# Altium PCB tree.PcbDoc
Units mm, origin at the board's own origin, x right, y up, seen from the top; angles counter-clockwise.
Board outline 106.17 x 111.16 mm, 2 copper layers (Top Layer, Bottom Layer); 29 components, 18 nets, 64 pads, 21 vias.
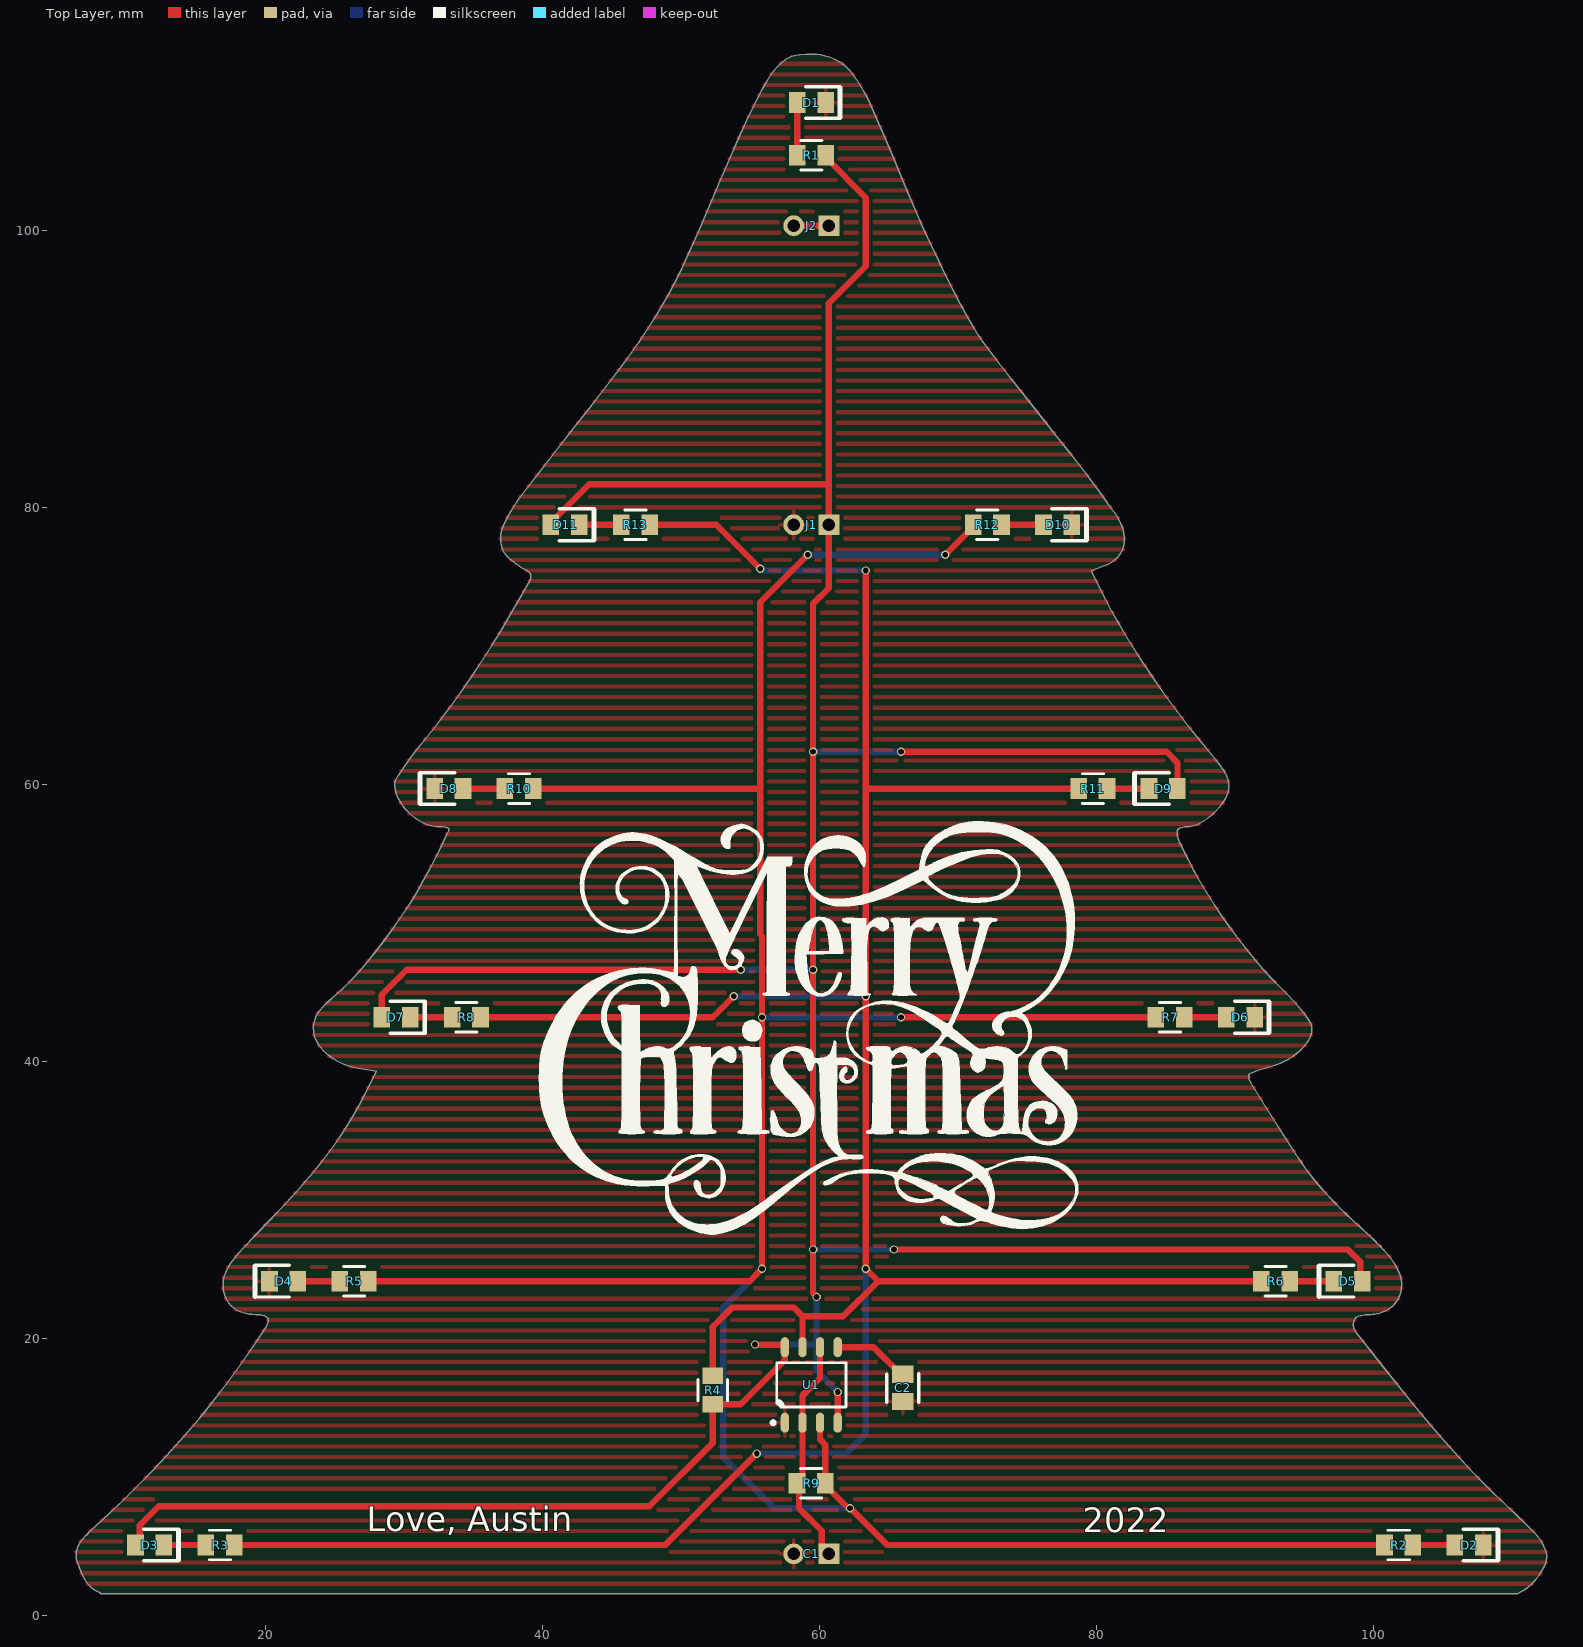
[diagram p0: Top Layer view]
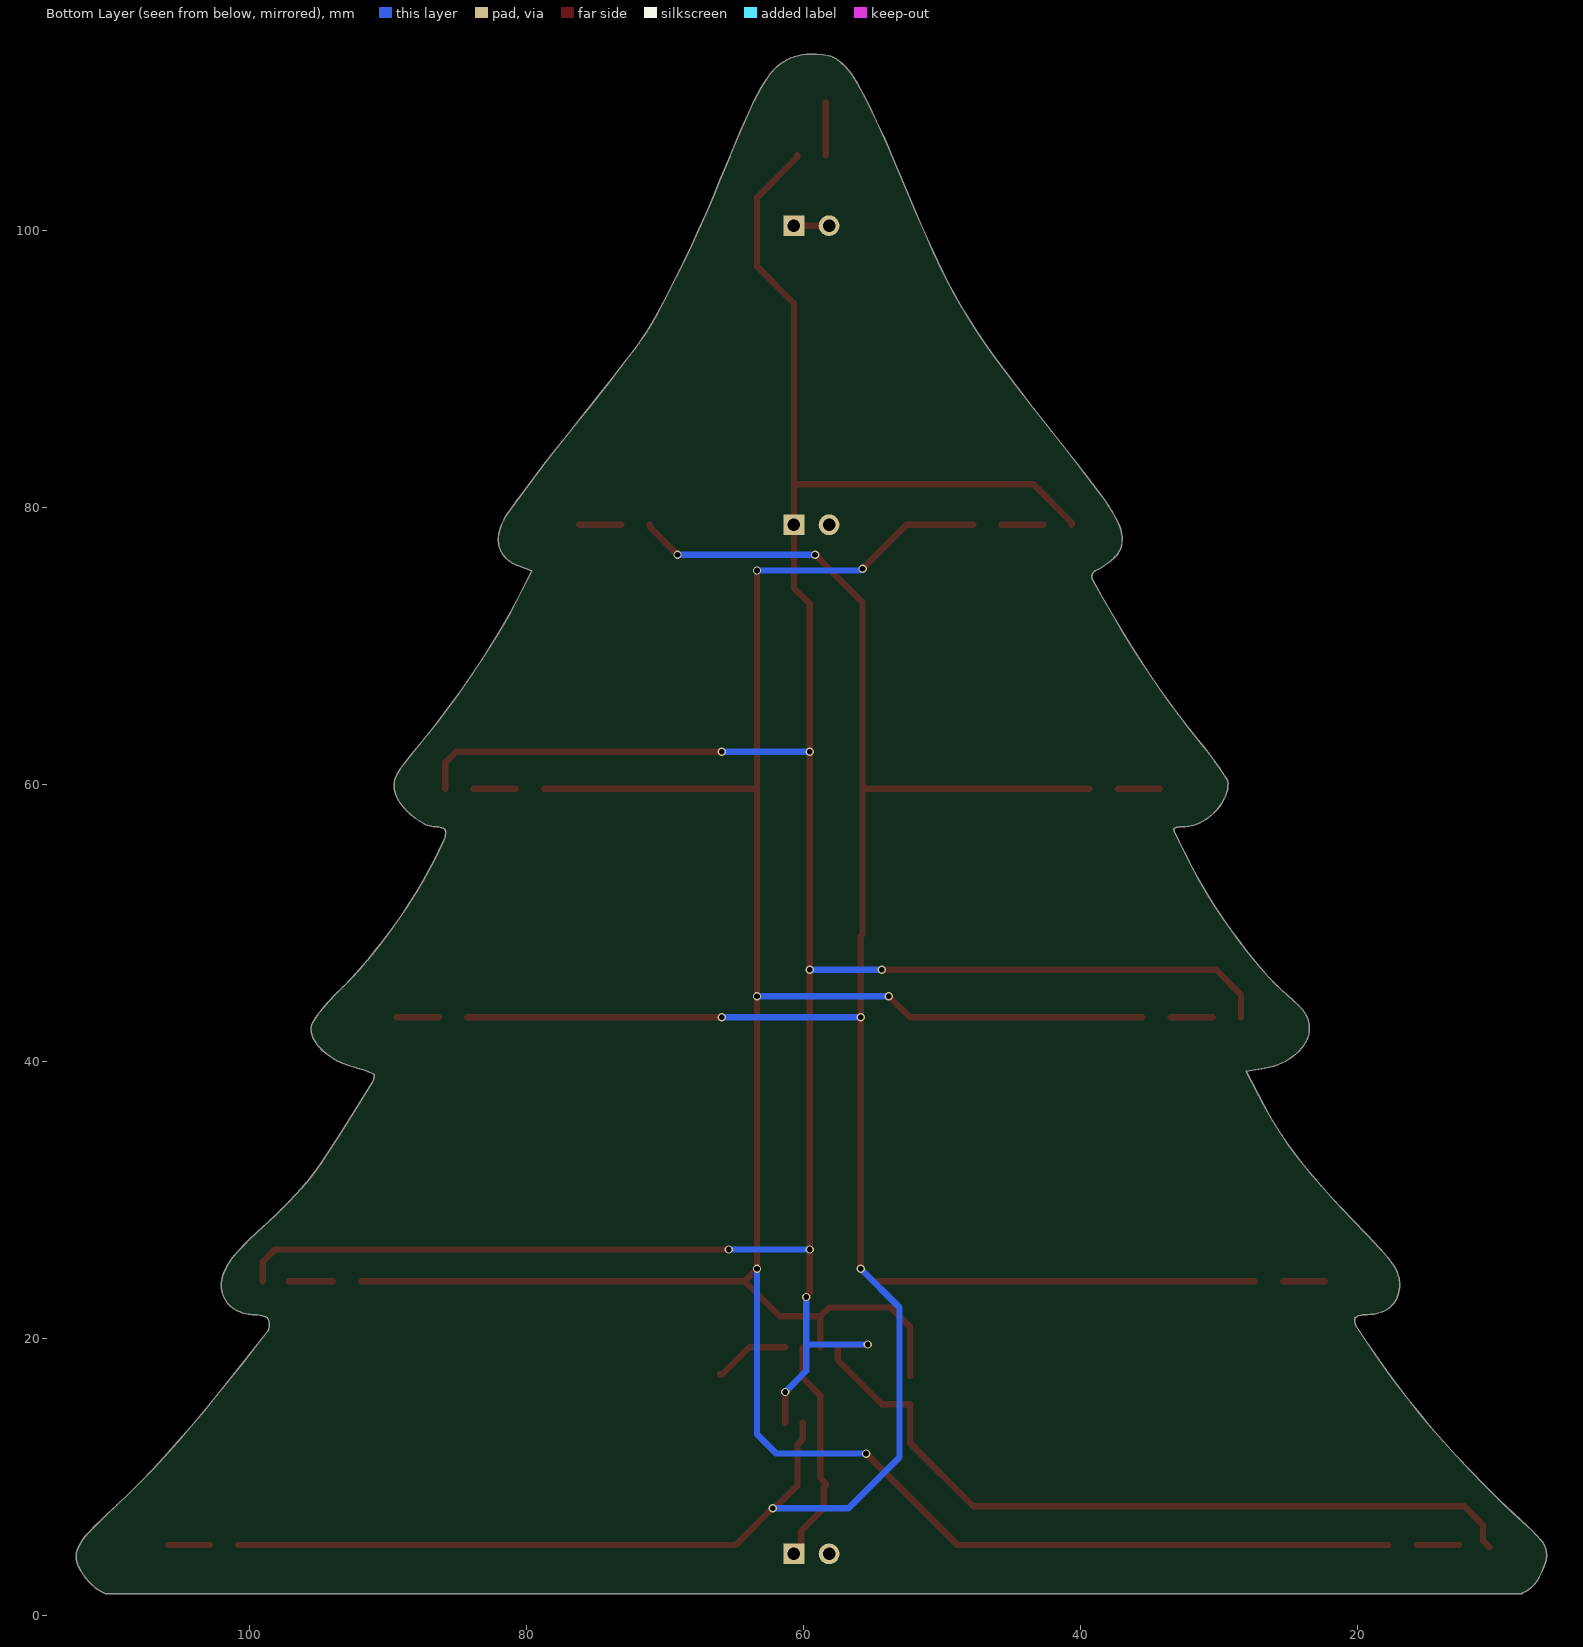
[diagram p1: Bottom Layer view, seen from below]

## Layer stack, top to bottom
Top Solder: solder mask 0.0102, Solder Resist, Dk 3.5
Top Layer: signal copper 0.0356
Dielectric 1: dielectric 0.32, FR-4, Dk 4.8
Bottom Layer: signal copper 0.0356
Bottom Solder: solder mask 0.0102, Solder Resist, Dk 3.5

## Board outline
6.914,2.724 cw(c13.83,6.267) 6.435,3.878 cw(c7.899,4.351) 6.399,4.69 cw(c8.105,4.304) 6.782,5.449 cw(c15.164,-1.801) 7.755,6.44 ccw(c-37.532,56.818) 9.781,8.338 ccw(c-52.017,71.658) 11.87,10.447 ccw(c-49.913,69.642) 13.847,12.582 ccw(c-26.649,48.823) 15.532,14.558 ccw(c-38.773,58.672) 17.189,16.679 ccw(c-35.564,56.264) 18.737,18.831 ccw(c-72.798,81.932) 20.056,20.788 ccw(c19.165,21.375) 20.232,21.375 ccw(c20.066,21.375) 20.166,21.506 ccw(c19.679,20.865) 19.965,21.618 ccw(c19.473,20.32) 19.673,21.694 ccw(c19.326,19.311) 19.326,21.719 cw(c19.326,24.947) 18.354,21.868 cw(c18.952,23.765) 17.604,22.304 cw(c18.845,23.648) 17.135,22.997 cw(c19.489,23.893) 16.97,23.893 cw(c19.128,23.893) 17.113,24.665 cw(c20.246,23.465) 17.533,25.438 cw(c26.554,18.876) 18.409,26.499 cw(c131.506,-79.341) 20.337,28.522 ccw(c-33.268,80.534) 22.66,31.029 ccw(c-5.032,55.54) 24.473,33.244 ccw(c1.068,50.931) 25.936,35.369 ccw(c2.135,50.263) 27.19,37.591 28.043,39.276 26.735,39.497 cw(c27.588,44.546) 25.476,39.881 cw(c27.191,43.669) 24.43,40.561 cw(c26.599,43.002) 23.735,41.432 cw(c25.458,42.377) 23.493,42.377 cw(c25.652,42.377) 23.574,42.962 cw(c25.33,42.467) 23.81,43.477 cw(c26.656,41.587) 24.272,44.033 cw(c36.902,31.073) 25.094,44.786 ccw(c14.504,57.082) 26.765,46.452 ccw(c-4.206,73.304) 28.638,48.778 ccw(c-6.88,75.3) 30.436,51.374 ccw(c3.401,68.708) 31.895,53.895 ccw(c-60.209,101.778) 32.425,54.928 ccw(c-19.974,81.428) 32.872,55.83 ccw(c-91.107,115.89) 33.246,56.609 ccw(c32.955,56.748) 33.278,56.748 ccw(c33.192,56.748) 33.233,56.823 ccw(c32.867,56.15) 33.081,56.886 ccw(c32.725,55.665) 32.865,56.929 ccw(c32.609,54.616) 32.609,56.943 cw(c32.609,59.655) 31.461,57.198 cw(c33.135,60.78) 30.391,57.933 cw(c33.068,60.71) 29.629,58.964 cw(c31.809,60.071) 29.364,60.071 cw(c29.923,60.071) 29.453,60.374 cw(c55.737,43.478) 30.004,61.202 cw(c51.001,46.743) 30.708,62.175 cw(c63.048,37.578) 31.543,63.236 ccw(c-16.928,102.71) 34.352,66.96 ccw(c-24.204,107.782) 36.974,71.007 ccw(c-69.272,134.873) 39.138,74.753 ccw(c38.714,74.989) 38.882,75.444 cw(c39.303,76.584) 38.662,75.551 cw(c42.704,82.067) 38.332,75.769 cw(c43.312,82.943) 37.965,76.037 cw(c43.384,83.037) 37.612,76.326 cw(c38.739,77.637) 37.022,77.437 cw(c39.466,77.721) 37.257,78.806 cw(c49.054,73.016) 38.591,80.966 cw(c245.472,-76.223) 42.112,85.496 ccw(c-127.549,220.416) 45.854,90.34 ccw(c8.961,118.015) 48.167,93.729 ccw(c17.906,112.474) 49.964,97 ccw(c-30.503,135.84) 51.9,101.297 cw(c443.036,-62.667) 53.872,105.924 cw(c122.195,76.326) 55.206,108.832 cw(c86.258,93.764) 56.213,110.75 cw(c60.904,108.097) 57.005,111.818 cw(c60.223,108.747) 57.527,112.285 cw(c58.611,110.862) 58.014,112.548 cw(c58.811,110.297) 58.616,112.678 cw(c59.537,101.447) 59.537,112.715 cw(c59.537,109.075) 61.192,112.318 cw(c59.572,109.143) 62.473,111.213 cw(c51.738,103.554) 63.805,108.872 cw(c-133.271,22.019) 66.052,103.583 ccw(c164.827,144.003) 67.568,100.062 ccw(c159.892,141.772) 69.19,96.643 ccw(c146.605,135.161) 70.719,93.711 ccw(c86.359,102.254) 71.89,91.85 ccw(c96.621,109.633) 72.535,90.986 ccw(c396.95,342.123) 73.867,89.275 ccw(c413.408,355.001) 75.452,87.262 ccw(c487.39,413.621) 77.13,85.155 cw(c-37.302,-6.459) 78.764,83.075 cw(c-2.519,20.372) 80.219,81.142 cw(c-11.497,13.776) 81.403,79.501 cw(c78.428,77.397) 81.781,78.822 cw(c78.661,77.496) 82.035,77.829 cw(c80.156,77.643) 81.915,76.957 cw(c80.273,77.598) 81.42,76.259 cw(c79.604,78.379) 80.589,75.768 79.645,75.411 80.733,73.251 ccw(c109.903,87.941) 82.045,70.893 ccw(c145.956,110.006) 83.846,68.092 ccw(c148.826,111.941) 85.834,65.282 ccw(c125.682,94.797) 87.736,62.873 cw(c42.545,24.852) 88.849,61.509 cw(c84.693,58.219) 89.357,60.737 cw(c87.75,59.87) 89.555,60.147 cw(c87.915,59.895) 89.536,59.539 cw(c87.24,60.043) 89.148,58.669 cw(c84.952,61.691) 88.363,57.805 cw(c85.069,61.558) 87.425,57.155 cw(c86.579,58.737) 86.579,56.943 ccw(c86.579,55.5) 86.033,56.836 ccw(c86.15,56.551) 85.841,56.543 ccw(c87.359,56.582) 85.978,55.952 ccw(c124.794,73.665) 86.64,54.568 ccw(c112.947,67.736) 87.97,52.192 ccw(c125.784,75.724) 89.652,49.683 ccw(c125.253,75.342) 91.484,47.315 ccw(c111.848,64.216) 93.266,45.373 cw(c69.674,21.448) 94.285,44.324 cw(c86.056,36.675) 94.998,43.477 cw(c89.753,39.487) 95.448,42.803 cw(c94.656,42.342) 95.573,42.342 cw(c94.019,42.342) 95.347,41.535 cw(c92.333,43.367) 94.681,40.736 cw(c91.517,44.281) 93.687,40.053 cw(c90.936,45.412) 92.493,39.593 ccw(c95.651,27.785) 91.923,39.426 ccw(c93.971,33.031) 91.443,39.252 ccw(c94.236,32.382) 91.069,39.087 ccw(c91.115,38.989) 91.007,38.989 ccw(c91.976,38.989) 91.15,38.483 ccw(c426.256,243.944) 92.81,35.799 ccw(c199.266,102.251) 94.429,33.273 ccw(c116.824,48.008) 95.599,31.633 ccw(c106.769,40.251) 96.259,30.839 ccw(c124.152,55.818) 97.159,29.869 ccw(c125.621,57.23) 98.133,28.89 ccw(c115.362,46.652) 99.036,28.057 cw(c83.14,9.952) 100.921,26.21 cw(c97.056,22.676) 101.879,24.718 cw(c99.853,23.86) 102.018,23.467 cw(c99.978,23.837) 101.443,22.371 cw(c100.267,23.548) 101.124,22.121 cw(c99.566,24.714) 100.701,21.91 cw(c99.551,24.752) 100.247,21.766 cw(c99.832,23.546) 99.832,21.719 ccw(c99.832,18.263) 99.452,21.698 ccw(c99.739,19.106) 99.103,21.635 ccw(c99.592,19.688) 98.826,21.543 ccw(c98.932,21.287) 98.696,21.433 ccw(c99.429,20.98) 98.748,20.452 ccw(c323.554,194.926) 102.353,15.904 ccw(c189.108,86.115) 106.172,11.432 ccw(c145.12,46.505) 109.587,7.976 cw(c76.393,-28.019) 111.68,5.927 cw(c109.148,3.492) 112.441,4.715 cw(c111.134,4.23) 112.412,3.673 cw(c108.274,5.475) 111.636,2.463 cw(c108.779,5.023) 110.418,1.555 110.418,1.577 8.114,1.577 8.111,1.622 cw(c9.007,3.796)

## Design rules (kind name [scope] priority, off if disabled: settings)
Clearance [All] p1: gap=0.254 ignorepadtopadclearanceinfootprint=FALSE except(0: Arc-Hole Track-Hole SMDPad-Hole THPad-Hole Via-Hole Fill-Hole Poly-Hole Region-Hole Text-Hole)
PolygonConnect [All] p1: connectstyle=Relief reliefconductorwidth=0.254 reliefentries=4 polygonreliefangle="90 Angle" airgapwidth=0.254
RoutingVias [All] p1: holewidth=0.406 width=0.61 viastyle="Through Hole" minholewidth=0.305 minwidth=0.457 maxholewidth=0.457 maxwidth=0.711
SilkToSolderMaskClearance [IsPad] p1: minsilkscreentomaskgap=0.025 clearancetoexposedcopper=TRUE
SolderMaskExpansion [All] p1: expansion=0.102 istentingtop=FALSE
Width [All] p1: maxlimit=0.61 minlimit=0.254 preferedwidth=0.457 minimp=50.000000 maximp=50.000000 favimp=50.000000
29 further rules are at their usual default settings.

## Components (designator, comment, footprint, x,y, rotation, side; value= is the part's Value field where it differs from the comment)
C1 "4.7uF" th_cap 60.706,4.445 r180 top
C2 "0.1uF" CAPC2012X09M 66.04,15.449 r90 top value=18pF
D1 "APT2012SURCK" LED_0805_A_K 58.42,109.22 r0 top
D2 "APT2012SURCK" LED_0805_A_K 105.9,5.08 r0 top
D3 "APT2012SURCK" LED_0805_A_K 10.65,5.08 r0 top
D4 "APT2012SURCK" LED_0805_A_K 22.37,24.13 r180 top
D5 "APT2012SURCK" LED_0805_A_K 99.205,24.13 r180 top
D6 "APT2012SURCK" LED_0805_A_K 89.39,43.18 r0 top
D7 "APT2012SURCK" LED_0805_A_K 28.43,43.18 r0 top
D8 "APT2012SURCK" LED_0805_A_K 34.29,59.69 r180 top
D9 "APT2012SURCK" LED_0805_A_K 85.87,59.69 r180 top
D10 "APT2012SURCK" LED_0805_A_K 76.2,78.74 r0 top
D11 "APT2012SURCK" LED_0805_A_K 40.64,78.74 r0 top
J1 "" th_cap 60.706,78.74 r180 top
J2 "" th_cap 60.706,100.33 r180 top
R1 "2.2k" RESC2012X06L65 58.42,105.41 r0 top value=120
R2 "4.7k" RESC2012X06L65 102.87,5.08 r180 top value=120
R3 "4.7k" RESC2012X06L65 15.73,5.08 r0 top value=120
R4 "10k" RESC2012X06L65 52.324,17.29 r270 top value=120
R5 "4.7k" RESC2012X06L65 25.4,24.13 r0 top value=120
R6 "4.7k" RESC2012X06L65 93.98,24.13 r180 top value=120
R7 "4.7k" RESC2012X06L65 86.36,43.18 r180 top value=120
R8 "4.7k" RESC2012X06L65 33.51,43.18 r0 top value=120
R9 "330k" RESC2012X06L65 60.452,9.548 r180 top value=120
R10 "4.7k" RESC2012X06L65 37.32,59.69 r0 top value=120
R11 "4.7k" RESC2012X06L65 80.79,59.69 r180 top value=120
R12 "4.7k" RESC2012X06L65 73.17,78.74 r180 top value=120
R13 "4.7k" RESC2012X06L65 45.72,78.74 r0 top value=120
U1 "ICM7555CBAZ" ICM7555CBAZ 59.436,16.637 r90 top

## Footprints (in the part's own frame and the unit in brackets; to place one, negate y for a bottom-side part, rotate by r counter-clockwise, add the part's x,y. Pads: shape width x height; smd on the part's side, far side on the other; paste and mask are expansions set on the pad)
CAPC2012X09M [mm] "Chip Capacitor, 2-Leads, Body 2.00x1.25mm, IPC Low Density"
  rect 1.25x1.55 smd: 1(0,0) 2(1.95,0)
  silkscreen extent -0.05,-1.14 1.98,1.14, body extent -0.13,-0.74 2.07,0.71, height 0.88
ICM7555CBAZ [mm] "SOIC, 8-Leads, Body 4.90x3.90mm, Pitch 1.27mm, IPC Medium Density"
  oval 1.45x0.6 smd: 1(-2.725,1.905) 2(-2.725,0.635) 3(-2.725,-0.635) 4(-2.725,-1.905) 5(2.725,-1.905) 6(2.725,-0.635) 7(2.725,0.635) 8(2.725,1.905)
  silkscreen extent -2.85,-2.5 1.6,2.88, body extent -3.01,-2.45 3.01,2.45, height 1.5
LED_0805_A_K [mm]
  rect 1.2x1.5 smd: 1(0,0) 2(2.05,0)
  silkscreen extent 0.6,-1.14 3.12,1.14, body extent 0.03,-0.62 2.03,0.63, height 0.77
RESC2012X06L65 [mm] "Chip Resistor, 2-Leads, Body 2.00x1.25mm, IPC Low Density"
  rect 1.2x1.5 smd: 1(0,0) 2(2.05,0)
  silkscreen extent 0.25,-1.07 1.8,1.07, body extent -0.05,-0.7 2.1,0.7, height 0.6
th_cap [mm] "Connector; Header; 2 Position"
  rect 1.5x1.5 hole 0.9: 1(0,0)
  round 1.5 hole 0.9: 2(2.54,0)
  body extent -1.27,-1.19 3.81,1.19, height 8.46

## Part data
C1: library part th_cap, "SMT Polarised Capacitor"
C2: library part C0805C180J5GACTU, "0.1pF 50V Ceramic Capacitor C0G, NP0 0805 (2012 Metric)", Dielectric="C0G, NP0", Manufacturer=Kemet, Operating Temperature="-55°C ~ 125°C", Package="0805 (2012 Metric)", Supplier Part Number 1=399-1112-1-ND, Tolerance=±5%, Voltage=50V, Category=Capacitors, ComponentLink1Description=Datasheet, ComponentLink1URL=http://www.kemet.com/Lists/ProductCatalog/Attachments/46/KEM_C1003_C0G_SMD.pdf, Manufacturer Part Number=C0805C180J5GACTU, Part Number=C0805C180J5GACTU, Price(qty 1000)=0.02040, RoHS="RoHS Compliant", Supplier 1=Digi-Key
D1 D2 D3 D4 D5 D6 D7 D8 D9 D10 D11: "LED RED CLEAR 0805 SMD", Color=Red, Current - Test=20mA, Lens Color=Colorless, Manufacturer=Kingbright, Millicandela Rating=80mcd, Package="0805 (2012 Metric)", Supplier Part Number 1=754-1133-1-ND, Category=LED, ComponentLink1Description=Datasheet, ComponentLink1URL=http://www.kingbrightusa.com/images/catalog/SPEC/APT2012SURCK.pdf, Height (Max)=0.75mm, Lens Transparency=Clear, Manufacturer Part Number=APT2012SURCK, Mounting Type="Surface Mount", Part Number=APT2012SURCK, Price(qty 1000)=0.08349, RoHS="Lead free / RoHS Compliant", Supplier 1=Digi-Key, Vf=1.95V, Viewing Angle=120°
J1 J2: library part HDR1x2, "2 PIN HEADER TIN"
R1 R2 R3 R4 R5 R6 R7 R8 R9 R10 R11 R12 R13: library part RC0805FR-07120RL, "RES SMD 1% 1/8W 0805", Manufacturer=Yageo, Operating Temperature="-55°C ~ 155°C", Package="0805 (2012 Metric)", Power="0.125W, 1/8W", Supplier Part Number 1=311-120CRCT-ND, Temperature Coefficient=±100ppm/°C, Tolerance=±1%, Category=Resistors, ComponentLink1Description=http://www.yageo.com/documents/recent/PYu-RC_Group_51_RoHS_L_04.pdf, ComponentLink1URL=http://www.yageo.com/documents/recent/PYu-RC_Group_51_RoHS_L_04.pdf, Composition="Thick Film", Features="Moisture Resistant", Height="0.024\" (0.60mm)", Manufacturer Part Number=RC0805FR-07120RL, Part Number=RC0805FR-07120RL, Price(qty 1000)=0.00379, RoHS="RoHS Compliant", Size / Dimension="0.079\" L x 0.049\" W (2.00mm x 1.25mm)", Supplier 1=Digi-Key
U1: "Timers & Support Products GEN PURPSE CMOS TIMR COM", Package=None, Availability=Unavailable, MF="On Shore", MP=USB-A1VSB6, Price=None, SnapEDA_Link=https://www.snapeda.com/parts/USB-A1VSB6/On%20Shore%20Technology%20Inc./view-part/481020/?ref=snap

## Via types
v1: diameter 0.61, hole 0.406, Top Layer to Bottom Layer, tented top, 21 vias

## Nets (pads, with @x,y where several pads share a name; then routed paths per layer and width w, separated by ;. In a path a pad name is that pad's centre, name@x,y a point inside that pad or via, vN(x,y) a via of type N, cw(c..) or ccw(c..) an arc to the next point about the centre after c; other vN are vias at no path point)
+5: D3.1 D5.1 D7.1 D9.1 D11.1 J1.1 R1.2 R4.2 U1.4 U1.8 | length 282.2
  Top Layer w0.457: D3.1@10.495,4.925 D3.1@10.805,5.235 ; D3.1@10.961,5.391 10.961,6.516 12.319,7.874 47.752,7.874 52.324,12.446 R4.2 54.356,15.24 57.531,18.415 U1.8 57.531,19.463 57.465,19.529 55.401,19.529 v1(55.372,19.558) ; D7.1 28.43,44.813 30.226,46.609 v1(54.356,46.609) ; D11.1 40.64,78.89 43.411,81.661 60.706,81.661 ; v1(59.817,22.987) 59.817,23.028 59.563,23.282 v1(59.563,26.416) v1(59.563,46.609) v1(59.563,62.357) 59.563,73.025 60.706,74.168 J1.1 60.706,81.661 ; R1.2 60.47,105.26 63.373,102.357 63.373,97.409 60.706,94.742 60.706,81.661 ; U1.4@61.314,13.939 U1.4 v1(61.341,16.129) ; v1(65.405,26.416) 98.171,26.416 99.06,25.527 D5.1@99.06,24.13 ; v1(65.913,62.357) 85.09,62.357 85.87,61.577 D9.1
  Bottom Layer w0.457: v1(54.356,46.609) v1(59.563,46.609) ; v1(55.372,19.558) 59.69,19.558 59.817,19.685 ; v1(59.563,26.416) v1(65.405,26.416) ; v1(59.563,62.357) v1(65.913,62.357) ; v1(59.817,22.987) 59.817,19.685 ; v1(61.341,16.129) 59.817,17.653 59.817,19.685
GND: C1.2 C2.1 D1.2 D2.2 D4.2 D6.2 D8.2 D10.2 J1.2 U1.1
NetC1_1: C1.1 R9.2 U1.2 U1.6 | length 16.6
  Top Layer w0.457: U1.6 60.071,17.145 58.801,15.875 U1.2 58.801,9.947 R9.2 58.402,9.398 58.547,9.253 58.547,7.747 60.185,6.109 60.185,4.966 C1.1
NetC2_2: C2.2 U1.5 | length 5.5
  Top Layer w0.457: U1.5 63.927,19.362 65.89,17.399 C2.2
NetD1_1: D1.1 R1.1 | length 3.8
  Top Layer w0.457: R1.1 D1.1
NetD2_1: D2.1 R2.1 | length 3
  Top Layer w0.457: R2.1 D2.1
NetD3_2: D3.2 R3.1 | length 3
  Top Layer w0.457: D3.2 R3.1
NetD4_1: D4.1 R5.1 | length 3
  Top Layer w0.457: D4.1 R5.1
NetD5_2: D5.2 R6.1 | length 3.2
  Top Layer w0.457: R6.1 D5.2
NetD6_1: D6.1 R7.1 | length 3
  Top Layer w0.457: R7.1 D6.1
NetD7_2: D7.2 R8.1 | length 3
  Top Layer w0.457: D7.2 R8.1
NetD8_1: D8.1 R10.1 | length 3
  Top Layer w0.457: D8.1 R10.1
NetD9_2: D9.2 R11.1 | length 3
  Top Layer w0.457: R11.1 D9.2
NetD10_1: D10.1 R12.1 | length 3
  Top Layer w0.457: R12.1 D10.1
NetD11_2: D11.2 R13.1 | length 3
  Top Layer w0.457: D11.2 R13.1
NetJ2_1: J2.1 J2.2 | length 2.5
  Top Layer w0.457: J2.2 J2.1
OUT_A: R2.2 R5.2 R7.2 R9.1 R10.2 R12.2 U1.3 | length 212.5
  Top Layer w0.457: R5.2 54.991,24.13 v1(55.88,25.019) v1(55.88,43.18) 55.88,49.043 55.753,49.17 55.753,59.69 ; R10.2 55.753,59.69 ; v1(59.182,76.581) 55.753,73.152 55.753,59.69 ; U1.3 60.071,12.7 60.452,12.319 R9.1 ; R9.1@60.823,9.027 R9.1@60.452,9.398 ; v1(62.23,7.747) 62.201,7.776 62.074,7.776 R9.1@60.452,9.398 ; v1@62.23,7.77 64.92,5.08 R2.2 ; v1(65.913,43.18) R7.2 ; v1(69.111,76.581) 71.12,78.59 R12.2 ; R9.1@60.452,9.398 R9.1 ; R9.1@60.452,9.398 R9.1
  Bottom Layer w0.457: v1(55.88,25.019) 53.086,22.225 53.086,11.43 56.769,7.747 v1(62.23,7.747) ; v1(55.88,43.18) v1(65.913,43.18) ; v1(59.182,76.581) v1(69.111,76.581)
OUT_B: R3.2 R4.1 R6.2 R8.2 R11.2 R13.2 U1.7 | length 220.6
  Top Layer w0.457: R3.2 48.895,5.08 v1(55.499,11.684) ; R8.2 52.324,43.18 v1(53.848,44.704) ; R13.2 52.578,78.74 v1(55.753,75.565) ; R4.1 52.324,20.828 53.721,22.225 58.166,22.225 58.801,21.59 ; U1.7 58.801,21.59 ; v1(63.373,75.438) 63.373,59.69 ; R11.2 63.373,59.69 ; R6.2 64.262,24.13 ; 58.801,21.59 61.722,21.59 64.262,24.13 ; 63.373,59.69 v1(63.373,44.704) v1(63.373,25.019) 64.262,24.13
  Bottom Layer w0.457: v1(53.848,44.704) v1(63.373,44.704) ; v1(55.499,11.684) 61.976,11.684 63.373,13.081 v1(63.373,25.019) ; v1(55.753,75.565) 55.794,75.565 55.921,75.438 v1(63.373,75.438)

## Polygon pours and split planes (outlines as drawn)
no net on Top Overlay (solid): 518 vertices, not listed, extent 58.932,33.969 78.64,57.313
no net on Top Overlay (solid): 60.384,31.09 cw(c60.404,31.177) 60.315,31.177 cw(c60.464,31.177) 60.392,31.308 cw(c65.242,22.514) 60.861,31.551 cw(c63.857,25.37) 61.392,31.781 cw(c63.072,27.413) 61.892,31.942 cw(c63.766,24.746) 62.568,32.085 cw(c63.635,25.552) 63.234,32.159 cw(c63.665,25.047) 63.928,32.168 cw(c63.551,21.944) 64.685,32.112 65.68,32.001 65.937,32.305 cw(c66.988,31.421) 66.218,32.559 cw(c69.415,27.835) 66.685,32.843 cw(c69.501,27.677) 67.201,33.093 cw(c68.31,30.482) 67.654,33.241 cw(c67.984,31.853) 67.838,33.273 cw(c68.912,22.844) 68.152,33.3 cw(c69.005,21.57) 68.515,33.321 cw(c69.027,21.023) 68.883,33.331 cw(c68.947,27.855) 69.703,33.279 cw(c69.186,29.57) 70.428,33.102 cw(c69.06,29.211) 71.135,32.776 cw(c67.167,25.958) 71.899,32.27 ccw(c71.973,32.37) 71.996,32.247 ccw(c71.577,34.556) 72.218,32.299 ccw(c71.256,35.683) 72.517,32.399 ccw(c68.696,42.354) 72.904,32.556 cw(c76.022,25.298) 73.763,32.867 cw(c75.529,26.948) 74.602,33.055 cw(c75.423,27.647) 75.409,33.117 cw(c75.421,28.65) 76.176,33.053 cw(c75.306,27.982) 77.02,32.833 cw(c75.958,29.827) 77.712,32.49 cw(c76.31,30.362) 78.236,32.03 cw(c76.652,30.658) 78.586,31.465 cw(c76.972,30.791) 78.577,30.096 cw(c75.745,31.323) 77.577,28.84 cw(c74.83,32.565) 75.84,28.048 cw(c74.694,33.173) 73.868,27.986 cw(c75.217,36.463) 73.533,28.047 cw(c77.12,45.971) 73.13,28.132 cw(c77.159,46.147) 72.726,28.227 cw(c75.009,37.454) 72.387,28.318 ccw(c67.447,11.107) 71.903,28.449 ccw(c71.664,27.52) 71.68,28.479 ccw(c71.671,27.921) 71.49,28.449 ccw(c72.547,25.36) 71.206,28.337 cw(c70.322,30.298) 70.517,28.156 cw(c70.144,32.256) 69.675,28.166 cw(c70.059,31.517) 68.966,28.326 cw(c69.066,28.617) 68.758,28.617 cw(c68.937,28.617) 68.827,28.758 cw(c68.969,28.575) 68.989,28.806 cw(c68.935,28.184) 69.232,28.734 cw(c68.488,27.353) 69.497,28.553 ccw(c70.136,29.312) 69.811,28.375 ccw(c70.288,29.75) 70.201,28.297 ccw(c70.306,30.053) 70.636,28.326 ccw(c70.215,30.527) 71.079,28.459 71.47,28.622 70.193,29.29 cw(c102.149,90.389) 69.695,29.553 cw(c89.674,67.003) 69.257,29.79 cw(c101.765,89.043) 68.888,29.994 cw(c69.17,30.5) 68.8,30.054 ccw(c68.712,29.948) 68.723,30.085 ccw(c68.672,29.426) 68.596,30.083 ccw(c68.723,28.974) 68.431,30.051 ccw(c69.126,27.488) 68.232,29.989 cw(c67.196,32.887) 67.253,29.81 cw(c67.215,31.875) 66.373,29.988 cw(c66.995,31.384) 65.759,30.486 cw(c66.83,31.264) 65.508,31.203 ccw(c62.625,31.071) 65.484,31.466 ccw(c65.188,31.425) 65.431,31.598 ccw(c65.199,31.432) 65.323,31.689 ccw(c64.212,29.394) 65.089,31.788 ccw(c64.642,30.567) 64.851,31.851 ccw(c63.984,26.53) 64.499,31.896 ccw(c63.778,24.38) 64.064,31.925 ccw(c63.548,18.318) 63.558,31.935 ccw(c63.55,21.327) 62.721,31.903 ccw(c63.035,27.896) 62.075,31.799 ccw(c62.751,29.051) 61.545,31.611 ccw(c62.705,29.149) 61.068,31.323 cw(c60.16,32.528) 60.818,31.17 cw(c60.373,32.089) 60.567,31.087 cw(c60.483,31.521)
no net on Top Overlay (solid): 58.716,45.6 cw(c61.326,47.219) 58.348,46.469 cw(c61.299,47.212) 58.257,47.116 cw(c64.989,47.328) 58.279,47.916 cw(c64.843,47.341) 58.394,48.69 cw(c60.599,48.229) 58.591,49.25 cw(c62.144,47.442) 58.814,49.634 cw(c60.712,48.385) 59.052,49.936 cw(c60.357,48.717) 59.31,50.164 cw(c60.144,49.011) 59.594,50.323 cw(c59.956,49.459) 59.888,50.394 cw(c60.019,48.608) 60.244,50.384 cw(c60.015,48.579) 60.595,50.304 cw(c60.263,49.315) 60.873,50.161 cw(c60.207,49.238) 61.153,49.871 cw(c58.536,48.121) 61.408,49.411 cw(c58.239,47.987) 61.596,48.882 cw(c59.218,48.248) 61.676,48.374 61.705,47.808 60.377,47.779 59.049,47.75 59.109,46.825 ccw(c65.375,47.231) 59.199,46.094 ccw(c61.708,46.556) 59.371,45.535 ccw(c60.746,46.135) 59.617,45.146 ccw(c60.188,45.647) 59.936,44.931 ccw(c60.143,45.519) 60.321,44.921 ccw(c60.006,45.98) 60.717,45.134 ccw(c59.778,46.251) 61.044,45.525 ccw(c59.605,46.35) 61.23,46.018 cw(c62.185,45.823) 61.271,46.161 cw(c61.832,45.954) 61.33,46.279 cw(c61.671,46.058) 61.401,46.362 cw(c61.507,46.242) 61.477,46.399 cw(c61.503,46.265) 61.639,46.249 cw(c60.201,46.42) 61.496,45.772 cw(c58.578,47.233) 61.122,45.19 cw(c60.1,46.011) 60.699,44.845 cw(c60.142,45.928) 60.007,44.718 cw(c60.178,46.242) 59.306,44.98 cw(c60.497,46.705)
no net on Top Overlay (solid): 1094 vertices, not listed, extent 39.779,27.502 63.203,57.111
GND on Top Layer "Top Layer-GND" (hatched Horizontal grid 0.762 track 0.305, pour order 1): 170 vertices, not listed, extent 6.363,1.555 112.528,112.715

## Silkscreen, mask and mechanical layers (free items; w line width, h text height)
Top Overlay:
  drawing of 1680 lines, arcs and shapes, not listed
  text "Love, Austin" at 27.33,6.079 h1.78
  text "2022" at 79.019,5.994 h1.78
Mechanical 1:
  drawing of 167 lines, arcs and shapes, not listed
Mechanical 2:
  lines w0.254: 121.999,39.116 129.999,39.116 129.999,52.616 121.999,52.616 121.999,39.116

## Dimensions
123.444,14.859 to 131.572,16.002 on Mechanical 2
110.418,1.577 to 120.904,14.478 on Mechanical 2
58.616,112.678 to 110.418,1.577 on Mechanical 2